# Allegro board proj1_redo.brd
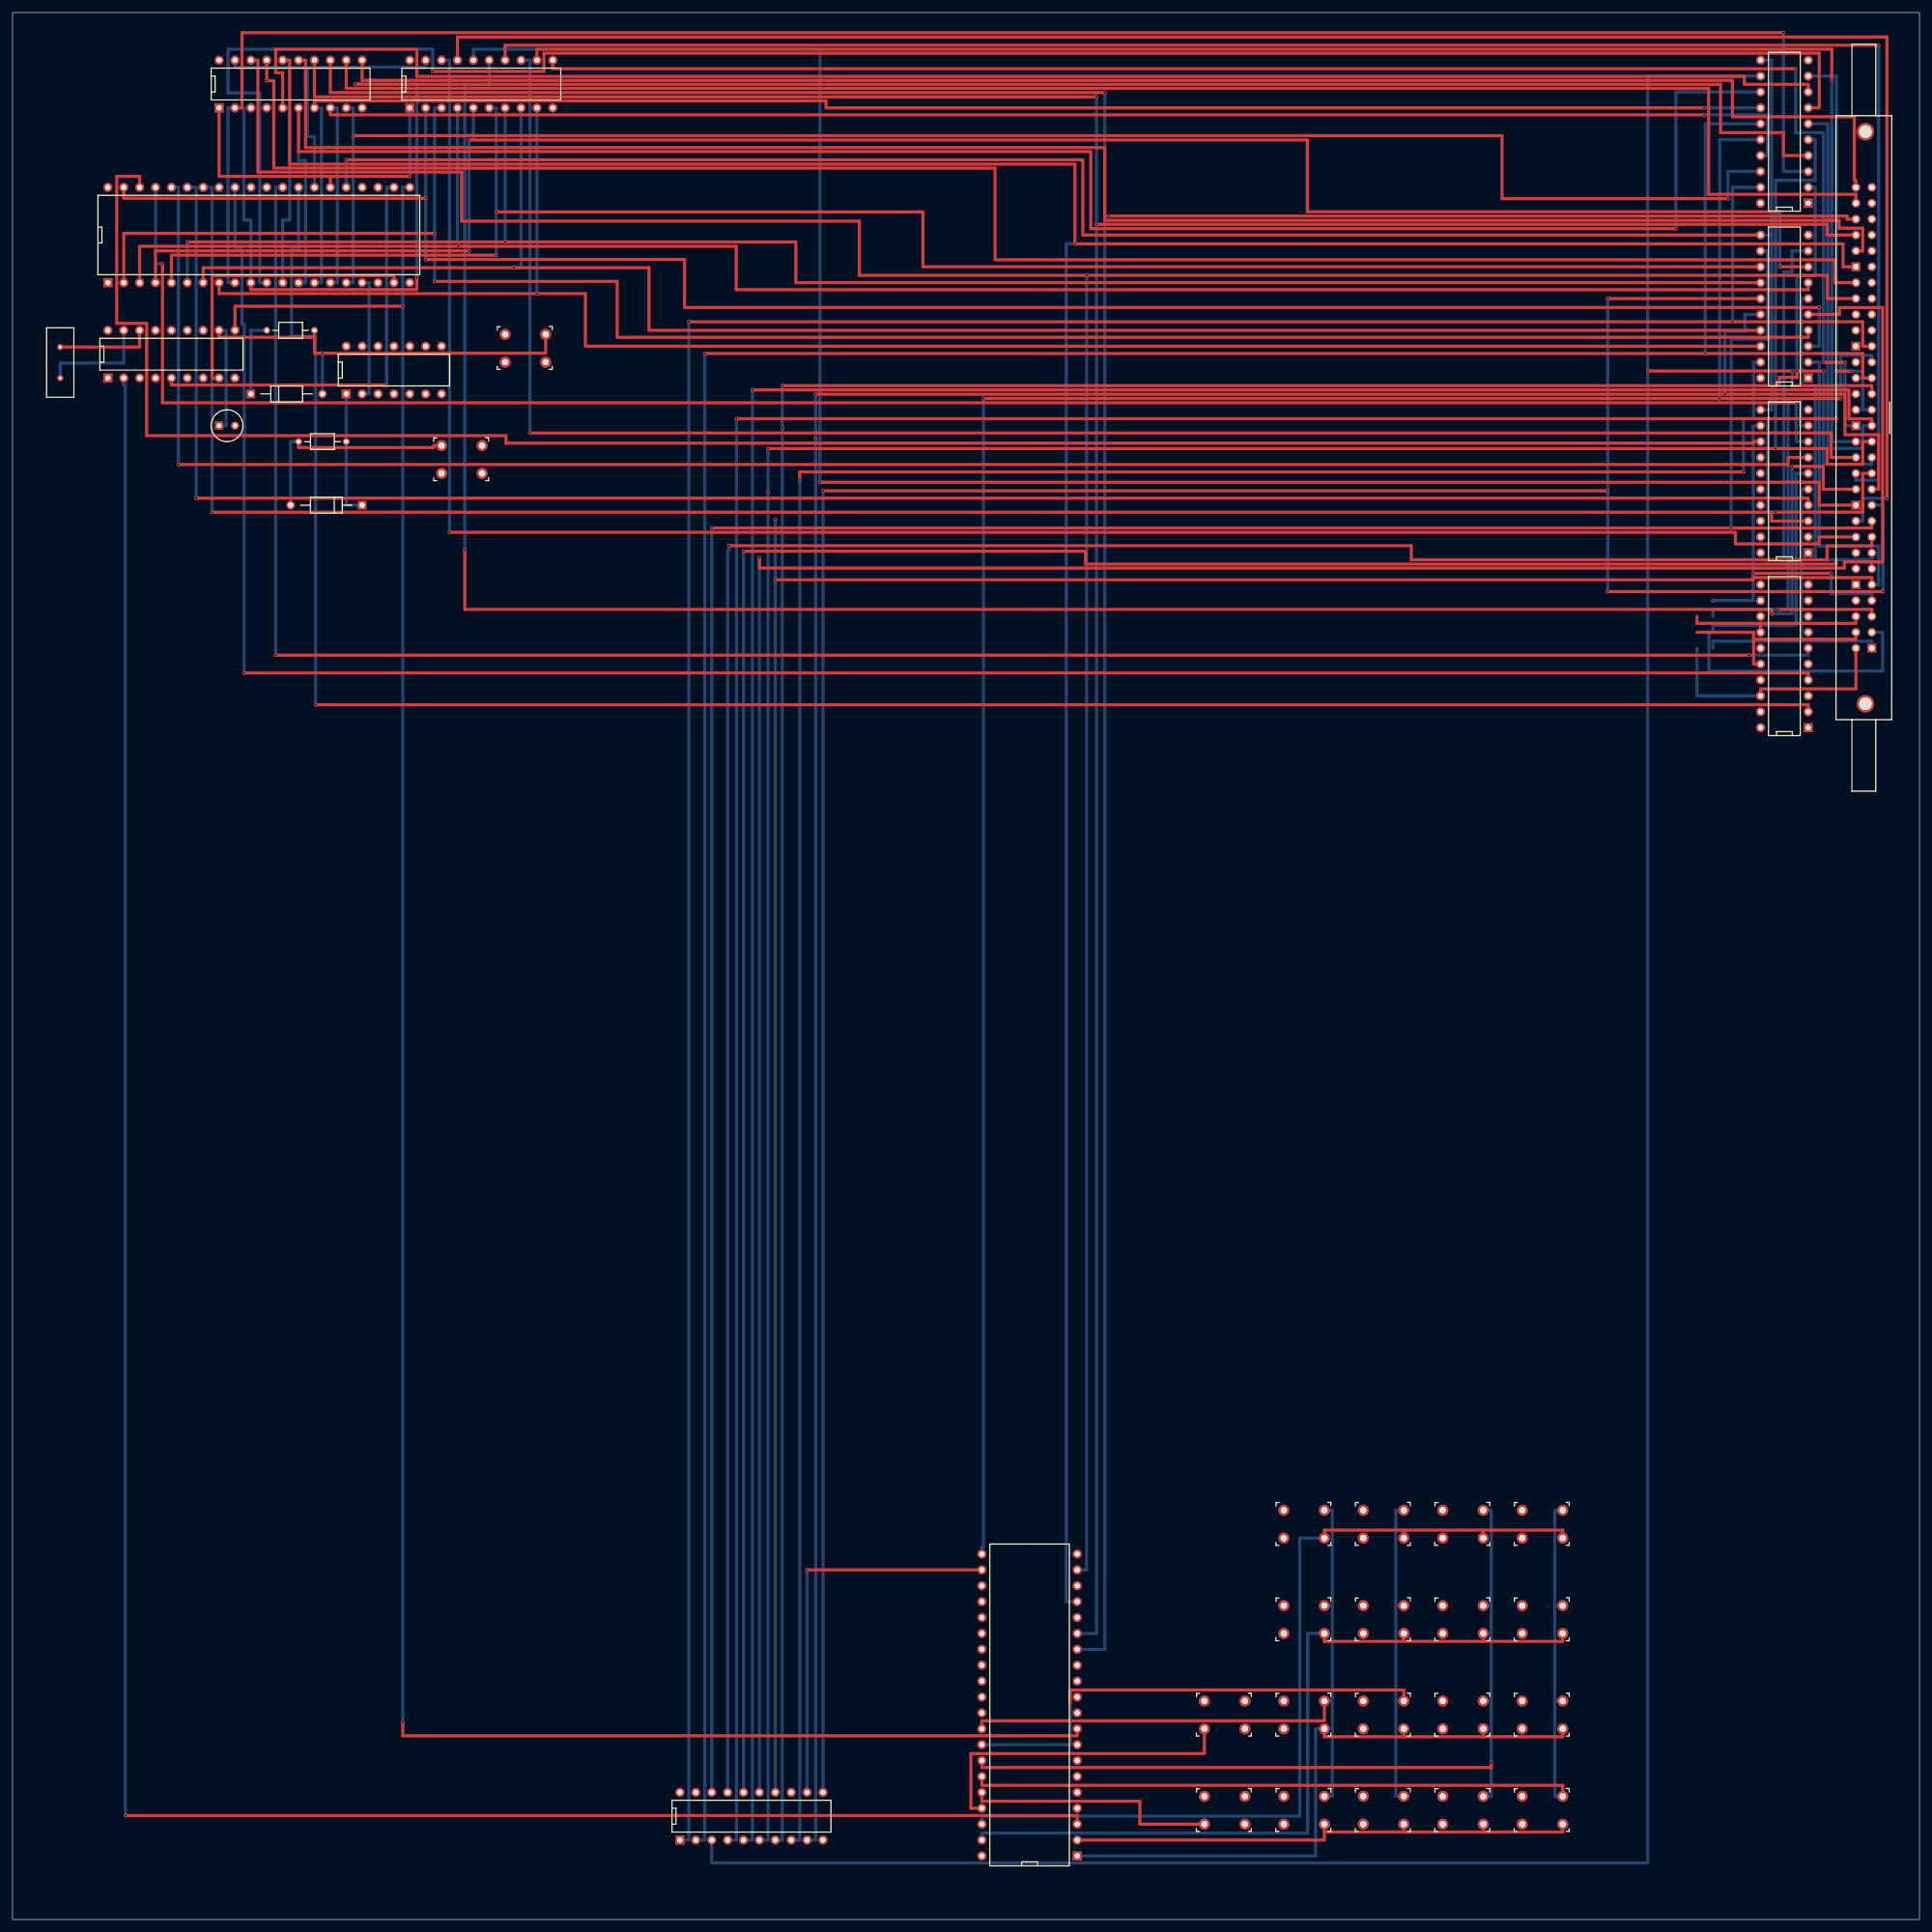
[diagram p0: board, top side]
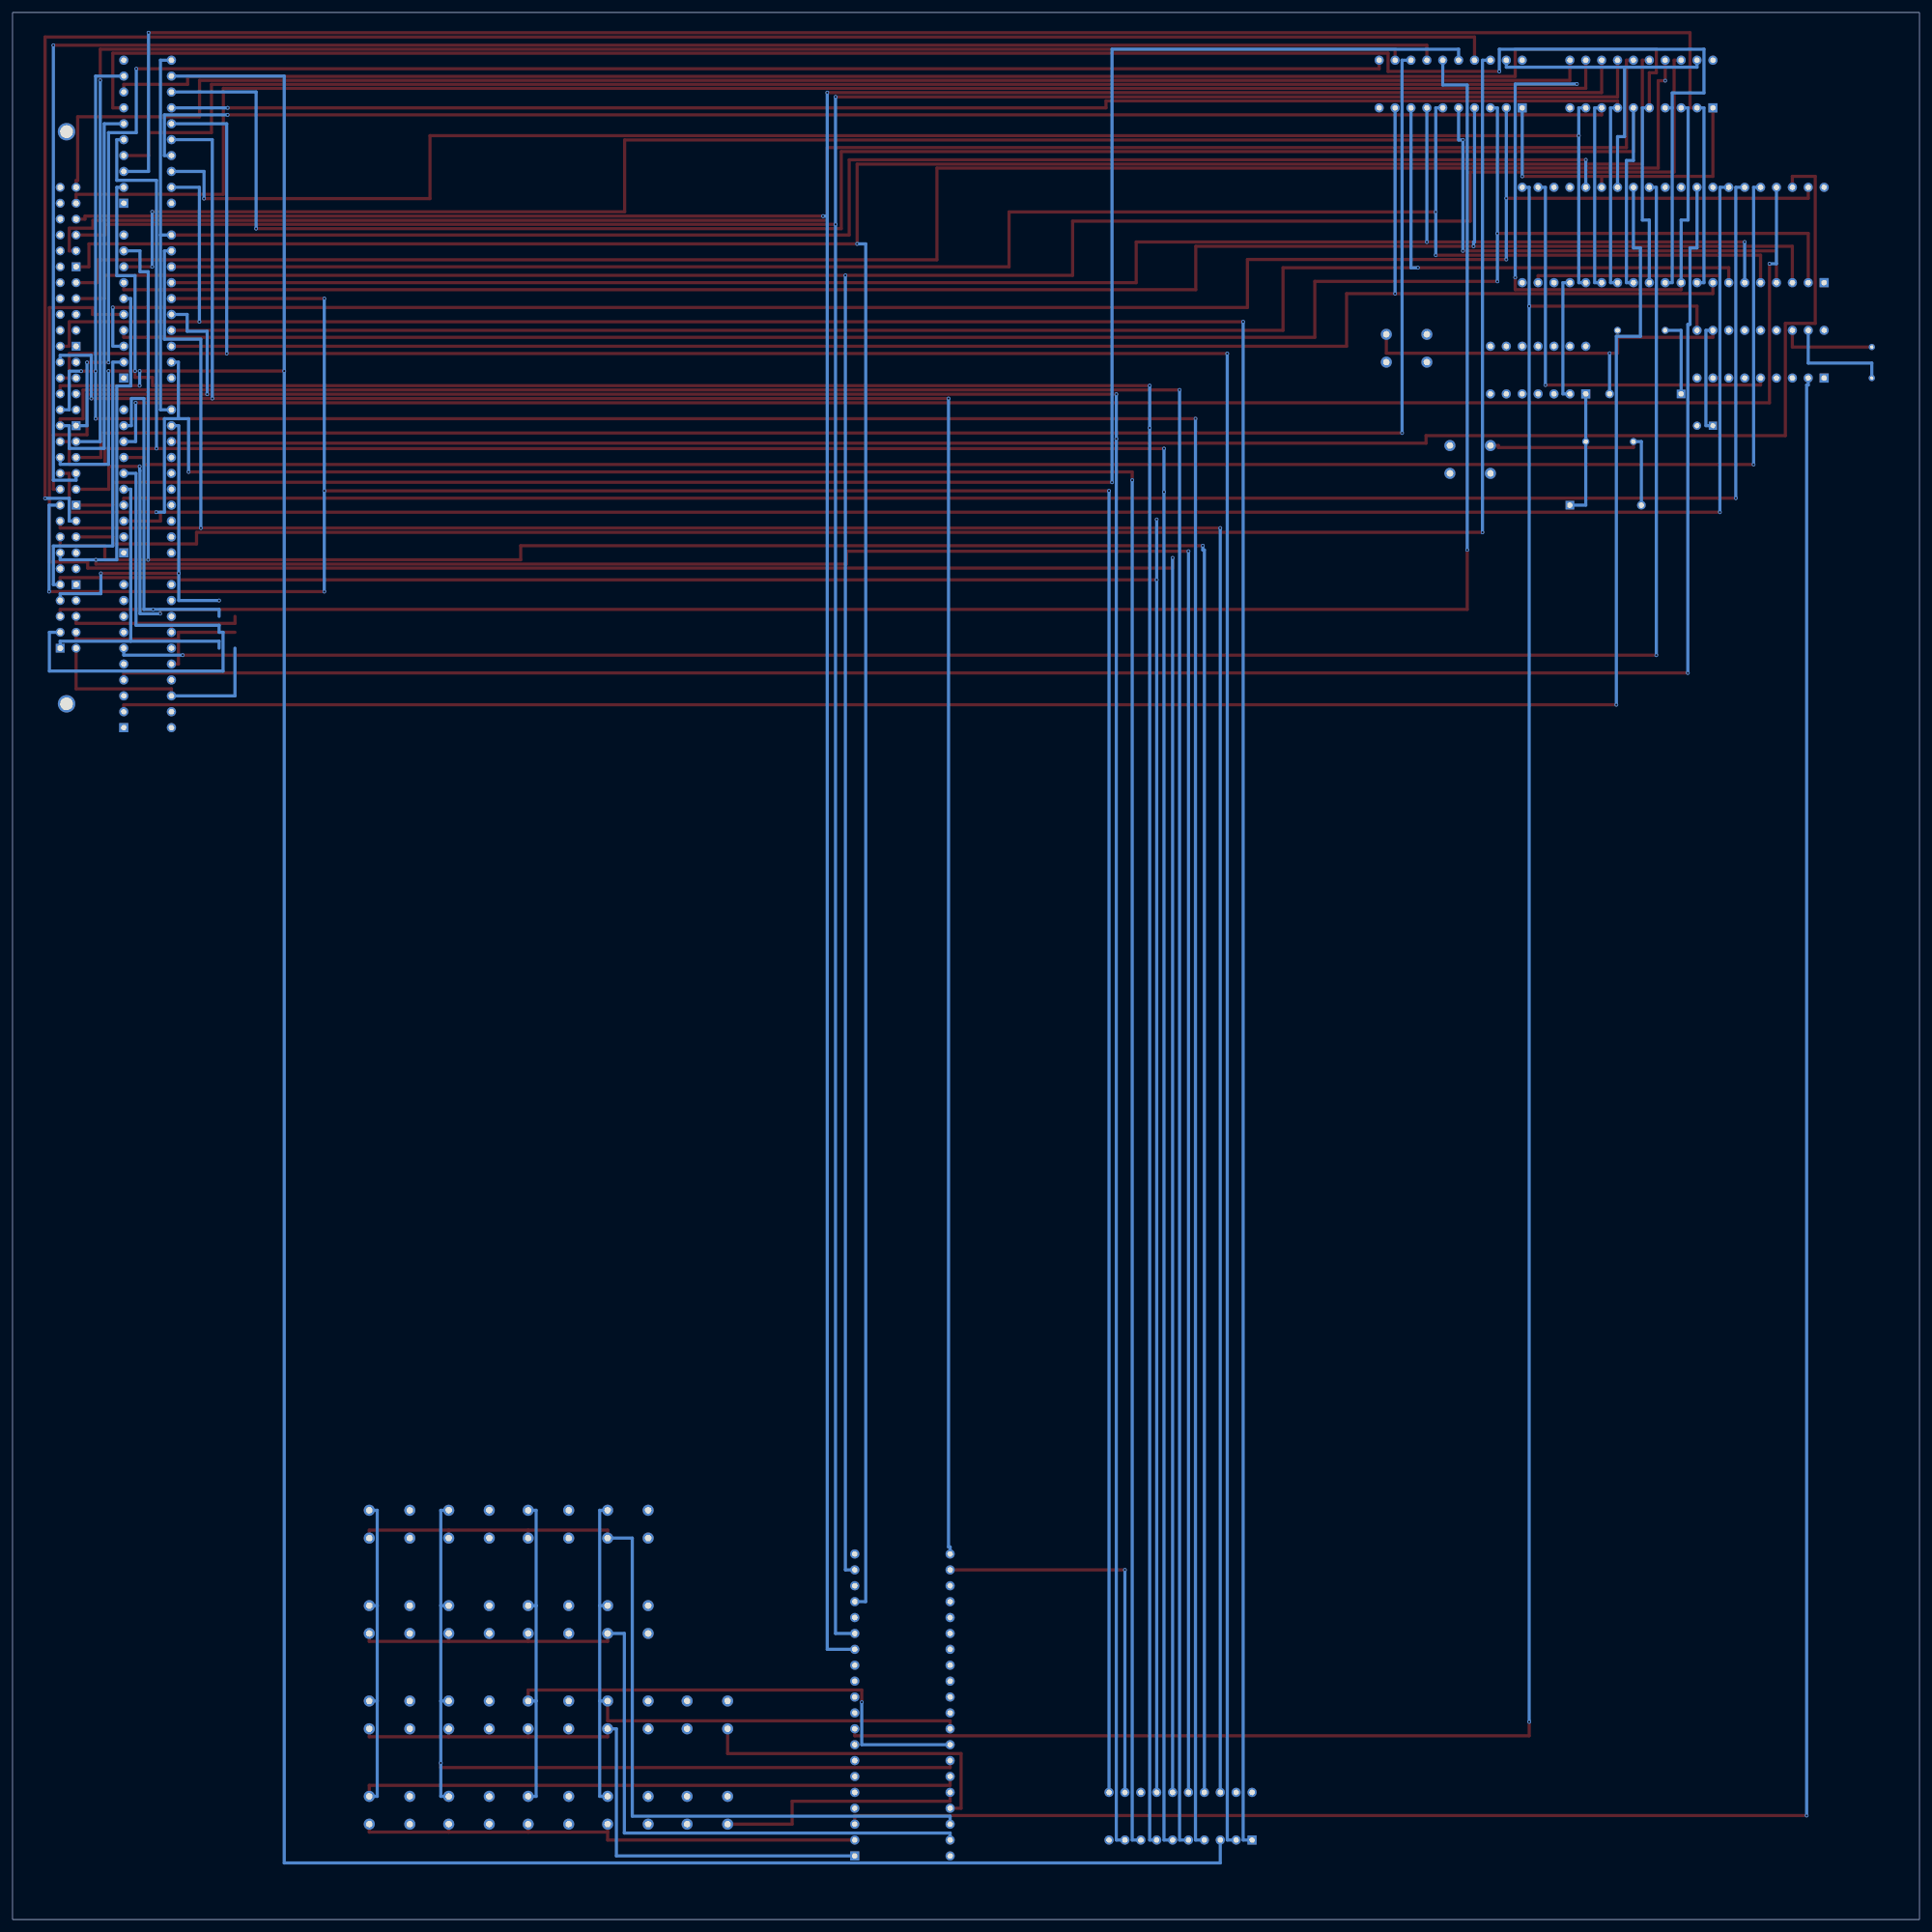
[diagram p1: board, bottom side, seen from below]

Outline 304.8 x 304.8 mm; copper layers: TOP, GND, POWER, BOTTOM. Coordinates in mm from the lower left corner of the outline.
Outline path: rectangle 0,0 304.8,304.8

## Placement (name value [footprint] x y rotation side)
C1  10u  [CPCYL1D200LS100031]  33.02 238.76 0 top
D1  DIODE  [DAX1DO35]  38.1 243.84 0 top
D2  DIODE  [DAX1DO35]  55.88 226.06 180 top
J10  HEADER 30x2/SM  [TYCO100VH60]  297.18 203.2 90 top
R1  10k  [AX300X100028]  40.64 254 0 top
R6  RESISTOR  [AX300X100028]  45.72 236.22 0 top
SW1  SW TACT-SPST-2/SM  [PTS645]  78.74 248.92 0 top
SW2  SW TACT-SPST-2  [PTS645]  203.2 60.96 0 top
SW3  SW TACT-SPST-2  [PTS645]  215.9 60.96 0 top
SW4  SW TACT-SPST-2  [PTS645]  228.6 60.96 0 top
SW5  SW TACT-SPST-2  [PTS645]  241.3 60.96 0 top
SW6  SW TACT-SPST-2  [PTS645]  203.2 45.72 0 top
SW7  SW TACT-SPST-2  [PTS645]  215.9 45.72 0 top
SW8  SW TACT-SPST-2  [PTS645]  228.6 45.72 0 top
SW9  SW TACT-SPST-2  [PTS645]  241.3 45.72 0 top
SW10  SW TACT-SPST-2  [PTS645]  203.2 30.48 0 top
SW11  SW TACT-SPST-2  [PTS645]  215.9 30.48 0 top
SW12  SW TACT-SPST-2  [PTS645]  228.6 30.48 0 top
SW13  SW TACT-SPST-2  [PTS645]  241.3 30.48 0 top
SW14  SW TACT-SPST-2  [PTS645]  203.2 15.24 0 top
SW15  SW TACT-SPST-2  [PTS645]  215.9 15.24 0 top
SW16  SW TACT-SPST-2  [PTS645]  228.6 15.24 0 top
SW17  SW TACT-SPST-2  [PTS645]  241.3 15.24 0 top
SW18  SW TACT-SPST-2  [PTS645]  190.5 30.48 0 top
SW19  SW TACT-SPST-2  [PTS645]  190.5 15.24 0 top
SW21  SW TACT-SPST-2/SM  [PTS645]  68.58 231.14 0 top
U1  8086MIN  [DIP10040W600L2025]  15.24 261.62 0 top
U2  8284A  [DIP10018W300L900]  15.24 246.38 0 top
U3  74LS244  [DIP10020W300L1000]  287.02 190.5 90 top
U4  74LS373  [DIP10020W300L1000]  287.02 218.44 90 top
U5  74LS373  [DIP10020W300L1000]  287.02 246.38 90 top
U6  74LS373  [DIP10020W300L1000]  287.02 274.32 90 top
U7  74LS245  [DIP10020W300L1000]  33.02 289.56 0 top
U8  74LS245  [DIP10020W300L1000]  63.5 289.56 0 top
U21  16L8  [DIP10020W300L1000]  106.68 12.7 0 top
U22  8279  [DIP10040W600L2025]  170.18 10.16 90 top
U35  74LS14  [DIP10014W300L700]  53.34 243.84 0 top
Y1  CRYSTAL  [XTAL_FOX]  7.62 246.38 90 top

## Library data of the parts
C1 = CAPACITOR
D1 D2 = DIODE
J10 = HEADER 30x2/SM
R1 R6 = RESISTOR
SW1 SW21 = SW TACT-SPST-2/SM
SW2-SW19 = SW TACT-SPST-2
U1 = 8086MIN
U2 = 8284A
U3 = 74LS244
U4-U6 = 74LS373
U7 U8 = 74LS245
U21 = 16L8_0
U22 = 8279
U35 = 74LS14
Y1 = CRYSTAL

## Footprints (pads in the part's own frame, mm; a bottom-side part is the same pattern mirrored in y, then rotated)
AX300X100028
  round 1.143 hole 0.711: 1(0,0) 2(7.62,0)
CPCYL1D200LS100031
  rect 1.321x1.321 hole 0.787: 1(0,0)
  round 1.321 hole 0.787: 2(2.54,0)
DAX1DO35
  rect 1.397x1.397 hole 0.864: 1(0,0)
  round 1.397 hole 0.864: 2(11.43,0)
DIP10014W300L700
  rect 1.473x1.473 hole 0.864: 1(0,0)
  round 1.473 hole 0.864: 2(2.54,0) 3(5.08,0) 4(7.62,0) 5(10.16,0) 6(12.7,0) 7(15.24,0) 8(15.24,7.62) 9(12.7,7.62) 10(10.16,7.62) 11(7.62,7.62) 12(5.08,7.62) 13(2.54,7.62) 14(0,7.62)
DIP10018W300L900
  rect 1.473x1.473 hole 0.864: 1(0,0)
  round 1.473 hole 0.864: 2(2.54,0) 3(5.08,0) 4(7.62,0) 5(10.16,0) 6(12.7,0) 7(15.24,0) 8(17.78,0) 9(20.32,0) 10(20.32,7.62) 11(17.78,7.62) 12(15.24,7.62) 13(12.7,7.62) 14(10.16,7.62) 15(7.62,7.62) 16(5.08,7.62) 17(2.54,7.62) 18(0,7.62)
DIP10020W300L1000
  rect 1.473x1.473 hole 0.864: 1(0,0)
  round 1.473 hole 0.864: 2(2.54,0) 3(5.08,0) 4(7.62,0) 5(10.16,0) 6(12.7,0) 7(15.24,0) 8(17.78,0) 9(20.32,0) 10(22.86,0) 11(22.86,7.62) 12(20.32,7.62) 13(17.78,7.62) 14(15.24,7.62) 15(12.7,7.62) 16(10.16,7.62) 17(7.62,7.62) 18(5.08,7.62) 19(2.54,7.62) 20(0,7.62)
DIP10040W600L2025
  rect 1.473x1.473 hole 0.864: 1(0,0)
  round 1.473 hole 0.864: 2(2.54,0) 3(5.08,0) 4(7.62,0) 5(10.16,0) 6(12.7,0) 7(15.24,0) 8(17.78,0) 9(20.32,0) 10(22.86,0) 11(25.4,0) 12(27.94,0) 13(30.48,0) 14(33.02,0) 15(35.56,0) 16(38.1,0) 17(40.64,0) 18(43.18,0) 19(45.72,0) 20(48.26,0) 21(48.26,15.24) 22(45.72,15.24) 23(43.18,15.24) 24(40.64,15.24) 25(38.1,15.24) 26(35.56,15.24) 27(33.02,15.24) 28(30.48,15.24) 29(27.94,15.24) 30(25.4,15.24) 31(22.86,15.24) 32(20.32,15.24) 33(17.78,15.24) 34(15.24,15.24) 35(12.7,15.24) 36(10.16,15.24) 37(7.62,15.24) 38(5.08,15.24) 39(2.54,15.24) 40(0,15.24)
PTS645
  round 1.778 hole 1.029: 1(0,0) 2(6.477,0) 3(0,4.445) 4(6.477,4.445)
TYCO100VH60
  rect 1.422x1.422 hole 0.914: 1(0,0) 10(10.16,2.54) 20(22.86,2.54) 30(35.56,2.54) 40(48.26,2.54) 50(60.96,2.54)
  round 1.422 hole 0.914: 2(0,2.54) 3(2.54,0) 4(2.54,2.54) 5(5.08,0) 6(5.08,2.54) 7(7.62,0) 8(7.62,2.54) 9(10.16,0) 11(12.7,0) 12(12.7,2.54) 13(15.24,0) 14(15.24,2.54) 15(17.78,0) 16(17.78,2.54) 17(20.32,0) 18(20.32,2.54) 19(22.86,0) 21(25.4,0) 22(25.4,2.54) 23(27.94,0) 24(27.94,2.54) 25(30.48,0) 26(30.48,2.54) 27(33.02,0) 28(33.02,2.54) 29(35.56,0) 31(38.1,0) 32(38.1,2.54) 33(40.64,0) 34(40.64,2.54) 35(43.18,0) 36(43.18,2.54) 37(45.72,0) 38(45.72,2.54) 39(48.26,0) 41(50.8,0) 42(50.8,2.54) 43(53.34,0) 44(53.34,2.54) 45(55.88,0) 46(55.88,2.54) 47(58.42,0) 48(58.42,2.54) 49(60.96,0) 51(63.5,0) 52(63.5,2.54) 53(66.04,0) 54(66.04,2.54) 55(68.58,0) 56(68.58,2.54) 57(71.12,0) 58(71.12,2.54) 59(73.66,0) 60(73.66,2.54)
  round 2.794 hole 2.032: HOLE1(-8.89,1.016) HOLE2(82.55,1.016)
XTAL_FOX
  round 1.016 hole 0.508: 1(0,0) 2(4.953,0)

## Nets
+5V: D1.1(K) R1.1
GND: C1.2 SW1.2 SW18.3 SW19.3 SW21.1 U1.1 U1.20 U1.33(MN) U1.40 U2.1(CSYNC) U2.9 U2.13(F/C\) U2.18 U3.1(1\O\E\) U3.10 U3.19(2\O\E\) U3.20 U4.1(O\E\) U4.10 U4.20 U5.1(O\E\) U5.10 U5.20 U6.1(O\E\) U6.10 U6.20 U7.10 U7.20 U8.10 U8.20 U21.10 U21.20 U22.20 U22.40 U35.7 U35.14
A0: J10.39 U6.19(Q7) U21.1(I1)
A1: J10.37 U6.16(Q6) U22.21(A0)
A2: J10.35 U6.15(Q5) U21.2(I2)
A3: J10.33 U6.12(Q4) U21.3(I3)
A4: J10.31 U6.9(Q3) U21.4(I4)
A5: J10.29 U6.6(Q2) U21.5(I5)
A6: J10.27 U6.5(Q1) U21.6(I6)
A7: J10.25 U6.2(Q0) U21.7(I7)
A8: J10.23 U5.19(Q7) U21.8(I8)
A9: J10.21 U5.16(Q6) U21.9(I9)
A10: J10.19 U5.15(Q5) U21.11(I10)
A11: J10.17 U5.12(Q4) U21.18(O\2\)
A12: J10.15 U5.9(Q3) U21.17(O\3\)
A13: J10.13 U5.6(Q2) U21.16(O\4\)
A14: J10.11 U5.5(Q1) U21.15(O\5\)
A15: J10.9 U5.2(Q0) U21.14(O\6\)
A16: J10.7 U4.12(Q4)
A17: J10.5 U4.9(Q3)
A18: J10.3 U4.6(Q2)
A19: J10.1 U4.5(Q1)
AD0: U1.16(AD0) U6.18(D7) U7.9(A7)
AD1: U1.15(AD1) U6.17(D6) U7.8(A6)
AD2: U1.14(AD2) U6.14(D5) U7.7(A5)
AD3: U1.13(AD3) U6.13(D4) U7.6(A4)
AD4: U1.12(AD4) U6.8(D3) U7.5(A3)
AD5: U1.11(AD5) U6.7(D2) U7.4(A2)
AD6: U1.10(AD6) U6.4(D1) U7.3(A1)
AD7: U1.9(AD7) U6.3(D0) U7.2(A0)
AD8: U1.8(AD8) U5.18(D7) U8.9(A7)
AD9: U1.7(AD9) U5.17(D6) U8.8(A6)
AD10: U1.6(AD10) U5.14(D5) U8.7(A5)
AD11: U1.5(AD11) U5.13(D4) U8.6(A4)
AD12: U1.4(AD12) U5.8(D3) U8.5(A3)
AD13: U1.3(AD13) U5.7(D2) U8.4(A2)
AD14: U1.2(AD14) U5.4(D1) U8.3(A1)
AD15: U1.39(AD15) U5.3(D0) U8.2(A0)
AD16: U1.38(A16/S3) U4.13(D4)
AD17: U1.37(A17/S4) U4.8(D3)
AD18: U1.36(A18/S5) U4.7(D2)
AD19: U1.35(A19/S6) U4.4(D1)
ALE: U1.25(ALE) U4.11(L\E\) U5.11(L\E\) U6.11(L\E\)
BHE: U4.2(Q0)
BHEX: U1.34(B\H\E\/S7) U4.3(D0)
D0: J10.60 U7.11(B7) U22.12(DB0)
D1: J10.58 U7.12(B6) U22.13(DB1)
D2: J10.56 U7.13(B5) U22.14(DB2)
D3: J10.54 U7.14(B4) U22.15(DB3)
D4: J10.52 U7.15(B3) U22.16(DB4)
D5: J10.50 U7.16(B2) U22.17(DB5)
D6: J10.48 U7.17(B1) U22.18(DB6)
D7: J10.46 U7.18(B0) U22.19(DB7)
D8: J10.30 U8.11(B7)
D9: J10.28 U8.12(B6)
D10: J10.26 U8.13(B5)
D11: J10.24 U8.14(B4)
D12: J10.22 U8.15(B3)
D13: J10.20 U8.16(B2)
D14: J10.18 U8.17(B1)
D15: J10.16 U8.18(B0)
DEN: U1.26(D\E\N\) U7.1(DIR) U8.1(DIR)
DTR: U1.27(DT/R\) U7.19(G\) U8.19(G\)
INTA: U1.24(I\N\T\A\)
IORC: U22.10(R\D\)
IOWC: U22.11(W\R\)
IR2: U22.4(IRQ)
MIO: J10.2 U3.18(Y1)
MIOX: U1.28(M/I\O\) U3.2(A1)
PCLK: U2.2(PCLK) U22.3(CLK)
RD: J10.4 U3.16(Y2)
RDX: U1.32(R\D\) U3.4(A2)
RESET: U1.21(RST) U2.10(RESET) U22.9(RESET)
WR: J10.6 U3.14(Y3)
WRX: U1.29(W\R\) U3.6(A3)
N00598: C1.1 D1.2(A) R1.2 SW1.4 U2.11(R\E\S\)
N00858: U2.16(X2) Y1.2
N00870: U2.17(X1) Y1.1
N02031: U1.22(READY) U2.5(READY)
N02057: U1.19(CLK) U2.8(CLK)
N55935: SW2.2 SW3.2 SW4.2 SW5.2 U22.38(RL0)
N56126: SW6.2 SW7.2 SW8.2 SW9.2 U22.39(RL1)
N56183: SW10.2 SW11.2 SW12.2 SW13.2 U22.1(RL2)
N56240: SW14.2 SW15.2 SW16.2 SW17.2 U22.2(RL3)
N56297: SW5.4 SW9.4 SW13.4 SW17.4 U22.35(SL3)
N56375: SW4.4 SW8.4 SW12.4 SW16.4 U22.34(SL2)
N56504: SW3.4 SW7.4 SW11.4 SW15.4 U22.33(SL1)
N56571: SW2.4 SW6.4 SW10.4 SW14.4 U22.32(SL0)
N56977: SW18.1 U22.37(CN/ST)
N56984: SW19.1 U22.36(SHFT)
N57547: U21.12(O\8\) U22.22(C\S\)
N125571: U35.4(Y)
N146408: U1.17(NMI) U35.2(Y)
N146815: D2.1(K) R6.2 U35.1(A)
N146827: D2.2(A) R6.1 SW21.3
N147071: SW21.2
N148364: U35.3(A)

Pads without a net: J10 8 10 12 14 32 34 36 38 40 41 42 43 44 45 47 49 51 53 55 57 59 HOLE1 HOLE2; SW1 1 3; SW2 1 3; SW3 1 3; SW4 1 3; SW5 1 3; SW6 1 3; SW7 1 3; SW8 1 3; SW9 1 3; SW10 1 3; SW11 1 3; SW12 1 3; SW13 1 3; SW14 1 3; SW15 1 3; SW16 1 3; SW17 1 3; SW18 2 4; SW19 2 4; SW21 4; U1 18 23 30 31; U2 3 4 6 7 12 14 15; U3 3 5 7 8 9 11 12 13 15 17; U4 14 15 16 17 18 19; U21 13 19; U22 5 6 7 8 23 24 25 26 27 28 29 30 31; U35 5 6 8 9 10 11 12 13

## Via types
v1: diameter 0.61, hole 0.33, TOP to BOTTOM, 109 vias

## Routing (per net, layer and track width the routed paths; a pad name or vN(x,y) marks a point on that pad's centre or on a via; arc(x,y) is an arc through that point)
+5V: length 12.7
  BOTTOM w0.508: R1.1 38.1,254 D1.1
A0: length 463
  TOP w0.508: J10.39 295.73,251.46 295.73,255.37 v1(274.93,255.37) v1(108.1,255.37)
  BOTTOM w0.508: U21.1 108.1,12.7 v1(108.1,255.37) ; v1(274.93,255.37) 274.93,276.86 U6.19
A1: length 382.8
  TOP w0.508: v1(155.19,243.1) v1(272.87,243.1) v1(292.2,243.1)
  BOTTOM w0.508: U22.21 154.94,59.54 155.19,59.54 v1(155.19,243.1) ; J10.37 297.18,250.01 292.2,250.01 v1(292.2,243.1) ; v1(272.87,243.1) 272.87,284.48 U6.16
A2: length 475
  TOP w0.508: v1(110.64,250.29) v1(270.56,250.29) 295.73,250.29 295.73,246.38 J10.35
  BOTTOM w0.508: U21.2 110.64,12.7 v1(110.64,250.29) ; U6.15 270.56,287.02 v1(270.56,250.29)
A3: length 496.4
  TOP w0.508: v1(284.48,245.16) 297.18,245.16 J10.33 ; v1(284.48,247.5) v1(261.37,247.5)
  BOTTOM w0.508: U6.12 261.37,294.64 v1(261.37,247.5) 261.37,9.04 111.76,9.04 U21.3 ; v1(284.48,245.16) v1(284.48,247.5)
A4: length 475.5
  TOP w0.508: v1(293.83,247.47) v1(291.52,247.47) ; v1(291.52,239.88) v1(115.72,239.88)
  BOTTOM w0.508: v1(293.83,247.47) 295.73,247.47 295.73,241.3 J10.31 ; U21.4 115.72,12.7 v1(115.72,239.88) ; U6.9 291.52,294.64 v1(291.52,247.47) v1(291.52,239.88)
A5: length 483.5
  TOP w0.508: J10.29 297.18,239.85 293.52,239.85 293.52,244.47 v1(118.26,244.47)
  BOTTOM w0.508: U6.6 290.14,287.02 290.14,235.13 295.73,235.13 295.73,238.76 J10.29 ; v1(118.26,244.47) 118.26,12.7 U21.5
A6: length 463.2
  TOP w0.508: v1(120.75,235.1) v1(281.79,235.1) 290.04,235.1 290.04,232.59 295.73,232.59 295.73,236.22 J10.27
  BOTTOM w0.508: v1(281.79,235.1) 281.79,277.98 288.14,277.98 288.14,284.48 U6.5 ; v1(120.75,235.1) v1(120.75,228.17) 120.75,12.7 U21.6
A7: length 459.5
  TOP w0.508: v1(289.46,247.5) v1(285.22,247.5) 285.22,246.48 282.42,246.48 282.42,245.16 v1(123.04,245.16)
  BOTTOM w0.508: J10.25 297.18,232.59 289.46,232.59 v1(289.46,247.5) ; v1(123.04,245.16) v1(123.04,238.4) 123.04,12.7 U21.7 ; U6.2 288.14,276.86 288.14,262.74 285.22,262.74 v1(285.22,247.5)
A8: length 431.2
  TOP w0.508: J10.23 295.73,231.14 295.73,224.94 v1(281.84,224.94) ; v1(276.66,231.37) 125.83,231.37 v1(125.83,230.05)
  BOTTOM w0.508: v1(276.66,231.37) 276.66,239.88 278.28,239.88 ; 278.28,239.88 280.52,239.88 280.52,224.94 v1(281.84,224.94) ; 278.28,239.88 278.28,248.92 U5.19 ; U21.8 125.83,12.7 v1(125.83,230.05)
A9: length 437.1
  TOP w0.508: v1(128.37,243.79) v1(273.69,243.79) 292.89,243.79 292.89,237.31 298.27,237.31 298.27,228.6 J10.21
  BOTTOM w0.508: v1(128.37,243.79) v1(128.37,236.65) 128.37,12.7 U21.9 ; U5.16 276.89,256.54 276.89,253.85 273.69,253.85 v1(273.69,243.79)
A10: length 464.3
  TOP w0.508: v1(298.96,212.24) v1(254.97,212.24) ; U5.15 v1(254.97,259.08) ; v1(254.97,228.35) v1(129.54,228.35)
  BOTTOM w0.508: v1(298.96,212.24) 298.96,226.06 J10.19 ; v1(254.97,212.24) v1(254.97,228.35) v1(254.97,259.08) ; U21.11 v1(129.54,228.35)
A11: length 439.9
  TOP w0.508: v1(111.76,222.4) v1(274.7,222.4) 297.18,222.4 J10.17
  BOTTOM w0.508: v1(274.7,222.4) 274.7,252.58 280.52,252.58 280.52,266.7 U5.12 ; U21.18 v1(111.76,222.4)
A12: length 441.3
  TOP w0.508: v1(114.55,219.58) 223.57,219.58 223.57,217.32 v1(283.11,217.32) 290.04,217.32 290.04,219.53 297.18,219.53 J10.15
  BOTTOM w0.508: U21.17 114.3,218.89 114.55,218.89 v1(114.55,219.58) ; v1(283.11,217.32) 283.11,263.37 284.43,263.37 284.43,266.7 U5.9
A13: length 431
  TOP w0.508: v1(116.84,218.69) 171.5,218.69 171.5,216.64 291.47,216.64 v1(291.47,217.32)
  BOTTOM w0.508: U21.16 v1(116.84,218.69) ; U5.6 285.9,259.08 285.9,245.11 288.14,245.11 288.14,217.32 v1(291.47,217.32) 297.18,217.32 J10.13
A14: length 434.2
  TOP w0.508: J10.11 297.18,216.99 ; 297.18,216.99 292.79,216.99 292.79,216 119.38,216 v1(119.38,217.63) ; 297.18,216.99 298.91,216.99 298.91,257.63 292,257.63 292,256.54 U5.5
  BOTTOM w0.508: U21.15 v1(119.38,217.63)
A15: length 428.1
  TOP w0.508: v1(121.92,214.12) 278.18,214.12 278.18,214.48 297.18,214.48 J10.9
  BOTTOM w0.508: J10.9 298.27,213.36 298.27,219.53 288.77,219.53 288.77,248.92 U5.2 ; v1(121.92,223.77) v1(121.92,214.12) U21.14
A16: length 58.9
  TOP w0.508: v1(290.68,215.16) v1(278.23,215.16)
  BOTTOM w0.508: U4.12 278.23,238.76 v1(278.23,215.16) 278.23,210.82 v1(271.78,210.82) ; v1(290.68,215.16) 290.68,211.91 297.18,211.91 J10.7
A17: length 70.4
  TOP w0.508: v1(282.32,209.4) 297.18,209.4 J10.5
  BOTTOM w0.508: 271.78,208.28 271.78,209.4 v1(282.32,209.4) 283.79,209.4 283.79,243.1 285.8,243.1 285.8,238.76 U4.9
A18: length 83.2
  BOTTOM w0.508: J10.3 298.91,205.74 298.91,199.54 271.15,199.54 271.15,205.74 271.78,205.74 271.78,206.86 285.06,206.86 285.06,231.14 U4.6
A19: length 53
  BOTTOM w0.508: 285.9,204.32 285.9,228.6 U4.5 ; 285.9,204.32 271.78,204.32 271.78,203.2 ; 285.9,204.32 297.18,204.32 J10.1
AD0: length 269.5
  TOP w0.508: v1(274.19,275.06) 238.07,275.06 238.07,285.12 v1(54.46,285.12)
  BOTTOM w0.508: v1(274.19,275.06) 274.19,279.4 U6.18 ; U1.16 54.46,261.62 v1(54.46,285.12) 54.46,289.56 U7.9
AD1: length 268.6
  TOP w0.508: U7.8 50.8,288.44 v1(270.41,288.44)
  BOTTOM w0.508: U1.15 51.92,261.62 51.92,289.56 U7.8 ; U6.17 280.52,281.94 280.52,288.44 v1(270.41,288.44)
AD2: length 263.6
  TOP w0.508: U7.7 48.26,290.68 130.02,290.68 130.02,289.56 v1(270.41,289.56)
  BOTTOM w0.508: U1.14 49.38,261.62 49.38,289.56 U7.7 ; U6.14 v1(270.41,289.56)
AD3: length 305
  TOP w0.508: v1(265.86,270.26) 172.34,270.26 172.34,282.57 45.72,282.57 U7.6
  BOTTOM w0.508: U7.6 45.72,281.15 46.84,281.15 46.84,261.62 U1.13 ; U6.13 265.86,292.1 v1(265.86,270.26)
AD4: length 292.5
  TOP w0.508: U7.5 43.18,295.17 42.06,295.17 42.06,298.93 64.62,298.93 64.62,294.59 276.81,294.59 276.81,293.32 287.02,293.32 U6.8
  BOTTOM w0.508: U1.12 43.18,271.63 44.3,271.63 44.3,289.56 U7.5
AD5: length 315.9
  TOP w0.508: v1(67.16,295.38) 84.94,295.38 84.94,298.3 288.77,298.3 288.77,289.56 U6.7
  BOTTOM w0.508: U7.4 39.52,289.56 ; 39.52,289.56 39.52,261.62 U1.11 ; 39.52,289.56 39.52,291.95 34.44,291.95 34.44,298.93 67.16,298.93 v1(67.16,295.38)
AD6: length 344.2
  TOP w0.508: U1.10 38.1,260.5 64.62,260.5 v1(64.62,262.45) ; U6.4 283.06,281.94 283.06,285.6 273,285.6 273,293.32 55.45,293.32 55.45,293.37 v1(54.76,293.37)
  BOTTOM w0.508: v1(64.62,262.45) 64.62,293.37 v1(54.76,293.37) ; U1.10 38.1,271.63 36.98,271.63 36.98,289.56 U7.3
AD7: length 315.8
  TOP w0.508: v1(283.06,301.57) 36.68,301.57 36.68,289.56 U7.2
  BOTTOM w0.508: U6.3 283.06,279.4 v1(283.06,301.57) ; U7.2 34.44,289.56 34.44,261.62 U1.9
AD8: length 286.2
  TOP w0.508: U1.8 33.02,259.87 v1(83.82,259.87) 91.57,259.87 91.57,251.46 U5.18
  BOTTOM w0.508: U8.9 v1(83.82,259.87)
AD9: length 288
  TOP w0.508: U1.7 30.48,264.01 v1(80.16,264.01) 101.73,264.01 101.73,254 U5.17
  BOTTOM w0.508: v1(80.16,264.01) 81.28,264.01 U8.8
AD10: length 285.9
  TOP w0.508: v1(27.94,268.12) v1(78.74,268.12) 125.2,268.12 125.2,261.62 U5.14
  BOTTOM w0.508: U8.7 v1(78.74,268.12) ; U1.6 v1(27.94,268.12)
AD11: length 291.8
  TOP w0.508: U5.13 145.52,264.16 145.52,272.92 v1(77.32,272.92) ; v1(77.32,266.01) 25.4,266.01 U1.5
  BOTTOM w0.508: v1(77.32,266.01) v1(77.32,272.92) 77.32,289.56 U8.6
AD12: length 313.1
  TOP w0.508: v1(72.97,266.7) 22.86,266.7 U1.4 ; U5.8 v1(282.47,264.16) ; v1(282.47,272.95) 206.96,272.95 206.96,284.43 v1(72.97,284.43)
  BOTTOM w0.508: U8.5 73.66,284.43 v1(72.97,284.43) v1(72.97,266.7) ; v1(282.47,264.16) v1(282.47,272.95)
AD13: length 302.8
  TOP w0.508: U5.7 287.02,260.5 115.67,260.5 115.67,267.44 v1(71.27,267.44) 20.32,267.44 U1.3
  BOTTOM w0.508: U8.4 71.12,268.12 71.27,268.12 v1(71.27,267.44)
AD14: length 316
  TOP w0.508: v1(67.46,269.5) 17.78,269.5 U1.2 ; U5.4 287.02,252.88 96.65,252.88 96.65,261.82 v1(67.46,261.82)
  BOTTOM w0.508: U8.3 67.46,289.56 v1(67.46,269.5) v1(67.46,261.82)
AD15: length 312.6
  TOP w0.508: v1(66.04,265.33) 107.42,265.33 107.42,257.66 v1(288.77,257.66) ; v1(66.04,275.11) 17.78,275.11 U1.39
  BOTTOM w0.508: v1(66.04,265.33) v1(66.04,275.11) U8.2 ; U5.3 288.77,251.46 v1(288.77,257.66)
AD16: length 311
  TOP w0.508: U4.13 278.28,236.22 278.28,235.97 78.87,235.97 78.87,237.17 21.44,237.17 21.44,255.12 16.66,255.12 16.66,278.61 20.32,278.61 U1.38
AD17: length 304.8
  TOP w0.508: v1(23.98,264.64) 23.98,242.42 v1(285.12,242.42)
  BOTTOM w0.508: v1(285.12,242.42) 285.12,236.22 U4.8 ; v1(23.98,264.64) 22.86,264.64 U1.37
AD18: length 307
  TOP w0.508: v1(26.52,232.56) 283.79,232.56 283.79,233.68 U4.7
  BOTTOM w0.508: U1.36 26.52,276.86 v1(26.52,232.56)
AD19: length 309.9
  TOP w0.508: U4.4 287.02,227.18 v1(29.36,227.18)
  BOTTOM w0.508: U1.35 29.36,276.86 v1(29.36,227.18)
ALE: length 303.6
  TOP w0.508: U5.11 171.07,269.24 171.07,281.25 v1(53.34,281.25)
  BOTTOM w0.508: U4.11 281.15,241.3 281.15,269.24 ; 281.15,269.24 281.15,297.18 U6.11 ; 281.15,269.24 U5.11 ; U1.25 v1(53.34,281.25)
BHEX: length 309.9
  TOP w0.508: v1(31.9,224.93) 281.15,224.93 281.15,223.52 U4.3
  BOTTOM w0.508: v1(31.9,224.93) 31.9,276.86 U1.34
D0: length 259.1
  TOP w0.508: U7.11 55.88,293.95 274.91,293.95 274.91,288.14 294.39,288.14 294.39,277.95 294.64,277.95 J10.60
D1: length 264.2
  TOP w0.508: U7.12 53.34,292.68 271.1,292.68 271.1,275.74 294.64,275.74 J10.58
D2: length 502.7
  TOP w0.508: J10.56 293.22,271.78 293.22,272.26 v1(175.26,272.26) ; U7.13 50.8,292 v1(174.57,292)
  BOTTOM w0.508: v1(175.26,272.26) 174.57,272.26 ; 174.57,272.26 174.57,43.18 U22.14 ; 174.57,272.26 v1(174.57,292)
D3: length 502.6
  TOP w0.508: U7.14 48.26,291.31 v1(173.25,291.31) ; v1(173.25,270.94) 290.04,270.94 290.04,269.24 J10.54
  BOTTOM w0.508: v1(173.25,291.31) v1(173.25,270.94) 173.25,45.72 U22.15
D4: length 281.6
  TOP w0.508: J10.52 295.73,266.7 295.73,270.33 291.95,270.33 291.95,271.58 174.57,271.58 174.57,283.21 46.84,283.21 46.84,297.18 U7.15
D5: length 504.6
  TOP w0.508: U7.16 44.3,297.18 44.3,280.57 169.8,280.57 v1(169.8,267.82) 292.58,267.82 292.58,264.16 J10.50
  BOTTOM w0.508: v1(169.8,267.82) 168.43,267.82 168.43,50.8 U22.17
D6: length 289.6
  TOP w0.508: U7.17 v1(40.64,293.9) 41.76,293.9 41.76,279.93 157.05,279.93 157.05,265.28 291.31,265.28 291.31,261.62 J10.48
D7: length 503
  TOP w0.508: J10.46 290.09,259.08 290.09,262.79 v1(171.68,262.79) 135.36,262.79 135.36,271.45 71.81,271.45 71.81,279.3 39.22,279.3 39.22,297.18 U7.18
  BOTTOM w0.508: U22.19 171.68,55.88 v1(171.68,262.79)
D8: length 266.7
  TOP w0.508: v1(292.89,248.87) v1(289.46,248.87) ; U8.11 86.36,295.81 v1(285.01,295.81)
  BOTTOM w0.508: v1(289.46,248.87) 289.46,285.6 285.01,285.6 v1(285.01,295.81) ; v1(292.89,248.87) 292.89,238.76 J10.30
D9: length 275.3
  TOP w0.508: v1(290.78,293.95) 290.78,298.93 83.82,298.93 U8.12
  BOTTOM w0.508: J10.28 290.78,236.22 v1(290.78,293.95)
D10: length 276.9
  TOP w0.508: v1(82.7,237.59) 290.68,237.59 290.68,233.68 J10.26
  BOTTOM w0.508: v1(82.7,237.59) 82.7,297.18 U8.13
D11: length 296.2
  TOP w0.508: U8.14 78.74,299.57 v1(298.27,299.57)
  BOTTOM w0.508: v1(298.27,299.57) 298.27,230.05 294.64,230.05 J10.24
D12: length 341.9
  TOP w0.508: v1(72.29,218.89) 72.29,209.4 281.2,209.4 v1(281.2,208.71) ; J10.22 289.41,228.6 289.41,232.26 v1(284.48,232.26)
  BOTTOM w0.508: U8.15 76.2,293.22 72.29,293.22 v1(72.29,218.89) ; v1(281.2,208.71) 284.43,208.71 284.43,231.57 284.48,231.57 v1(284.48,232.26)
D13: length 295.6
  TOP w0.508: J10.20 288.77,226.06 288.77,229.72 v1(129.06,229.72)
  BOTTOM w0.508: U8.16 73.66,298.93 129.06,298.93 v1(129.06,229.72)
D14: length 314.5
  TOP w0.508: v1(299.59,227.15) 299.59,300.89 71.12,300.89 U8.17
  BOTTOM w0.508: J10.18 295.73,223.52 295.73,227.15 v1(299.59,227.15)
D15: length 304.5
  TOP w0.508: v1(69.85,221.72) 275.38,221.72 275.38,219.86 288.77,219.86 288.77,220.98 J10.16
  BOTTOM w0.508: U8.18 69.85,297.18 v1(69.85,221.72)
DEN: length 54.1
  TOP w0.508: v1(63.5,278.61) 50.8,278.61 ; 50.8,278.61 U1.26 ; 50.8,278.61 33.02,278.61 U7.1
  BOTTOM w0.508: U8.1 v1(63.5,278.61)
DTR: length 53
  BOTTOM w0.508: 47.14,296.06 66.04,296.06 U8.19 ; 47.14,296.06 35.56,296.06 U7.19 ; 47.14,296.06 47.14,284.96 48.26,284.96 U1.27
MIO: length 40.6
  TOP w0.508: U3.18 279.4,196.7 294.64,196.7 J10.2
  BOTTOM w0.508: 269.24,203.2 269.24,195.58 U3.18
MIOX: length 327.4
  TOP w0.508: U3.2 287.02,194.16 v1(48.45,194.16)
  BOTTOM w0.508: v1(48.45,194.16) 48.45,253.05 44.6,253.05 44.6,267.18 45.72,267.18 U1.28
PCLK: length 383.5
  TOP w0.508: U22.3 170.18,16.61 v1(18.03,16.61)
  BOTTOM w0.508: v1(18.03,16.61) 18.03,245.26 17.78,245.26 U2.2
RD: length 32.7
  TOP w0.508: 278.28,204.62 278.28,205.74 269.24,205.74 ; 278.28,204.62 278.28,200.66 U3.16 ; 278.28,204.62 294.64,204.62 J10.4
RDX: length 330.2
  TOP w0.508: v1(37.02,199.24) 287.02,199.24 U3.4
  BOTTOM w0.508: v1(37.02,199.24) 37.02,254.95 36.68,254.95 36.68,267.18 35.56,267.18 U1.32
RESET: length 388.2
  TOP w0.508: v1(62.38,257.86) 35.56,257.86 U2.10 ; U22.9 170.18,29.36 62.38,29.36 v1(62.38,31.6)
  BOTTOM w0.508: v1(62.38,31.6) v1(62.38,257.86) 62.38,276.86 U1.21
WR: length 29.1
  TOP w0.508: 269.24,208.28 269.24,207.16 279.4,207.16 ; 279.4,207.16 U3.14 ; 279.4,207.16 294.64,207.16 J10.6
WRX: length 322
  TOP w0.508: v1(277.6,202.08) v1(42.06,202.08)
  BOTTOM w0.508: v1(277.6,202.08) 287.02,202.08 U3.6 ; U1.29 42.06,276.86 v1(42.06,202.08)
N00598: length 84
  TOP w0.508: 48.26,252.88 48.26,250.34 v1(49.53,250.34) 85.22,250.34 SW1.4 ; 48.26,252.88 R1.2 ; 48.26,252.88 33.02,252.88 U2.11
  BOTTOM w0.508: U2.11 34.14,254 34.14,238.76 C1.1 ; D1.2 v1(49.53,250.34)
N00858: length 15.4
  TOP w0.508: U2.16 20.32,251.33 Y1.2
N00870: length 17.8
  BOTTOM w0.508: U2.17 17.78,248.77 7.62,248.77 Y1.1
N02031: length 68.3
  TOP w0.508: U2.5 25.4,245.26 v1(59.79,245.26)
  BOTTOM w0.508: v1(59.79,245.26) 59.79,276.86 U1.22
N02057: length 47.7
  TOP w0.508: U1.19 60.96,262.74 31.9,262.74 31.9,246.38 U2.8
N55935: length 143.6
  TOP w0.508: SW4.2 235.08,62.23 ; 235.08,62.23 222.38,62.23 ; 235.08,62.23 247.78,62.23 SW5.2 ; 222.38,62.23 209.68,62.23 SW2.2 ; 222.38,62.23 SW3.2
  BOTTOM w0.508: U22.38 154.94,16.51 205.74,16.51 205.74,60.96 SW2.2
N56126: length 130.9
  TOP w0.508: SW9.2 247.78,44.45 235.08,44.45 ; 235.08,44.45 222.38,44.45 ; 235.08,44.45 SW8.2 ; 222.38,44.45 209.68,44.45 SW6.2 ; 222.38,44.45 SW7.2
  BOTTOM w0.508: SW6.2 207.01,45.72 207.01,13.82 154.94,13.82 U22.39
N56183: length 103
  TOP w0.508: 235.08,29.21 247.78,29.21 SW13.2 ; 235.08,29.21 222.38,29.21 ; 235.08,29.21 SW12.2 ; SW10.2 209.68,29.21 222.38,29.21 ; 222.38,29.21 SW11.2
  BOTTOM w0.508: U22.1 208.28,10.16 208.28,30.48 SW10.2
N56240: length 83.9
  TOP w0.508: 209.68,13.97 222.38,13.97 ; 209.68,13.97 209.68,12.7 U22.2 ; 209.68,13.97 SW14.2 ; 222.38,13.97 235.08,13.97 ; 222.38,13.97 SW15.2 ; 235.08,13.97 247.78,13.97 SW17.2 ; 235.08,13.97 SW16.2
N56297: length 146.8
  TOP w0.508: 247.78,19.68 247.78,21.44 154.94,21.44 U22.35
  BOTTOM w0.508: 246.51,34.92 246.51,19.68 247.78,19.68 ; 246.51,34.92 SW13.4 ; 246.51,34.92 246.51,50.16 ; 247.78,65.41 246.51,65.41 246.51,50.16 ; SW9.4 246.51,50.16
N56375: length 134.1
  TOP w0.508: U22.34 154.94,24.28 236.35,24.28 v1(236.35,25.02)
  BOTTOM w0.508: SW8.4 236.35,50.16 ; 236.35,50.16 236.35,65.41 235.08,65.41 ; 236.35,50.16 236.35,34.92 ; SW12.4 236.35,34.92 ; 236.35,34.92 v1(236.35,25.02) 236.35,19.68 235.08,19.68
N56504: length 128.7
  TOP w0.508: SW11.4 222.38,36.68 169.06,36.68 v1(169.06,34.73)
  BOTTOM w0.508: 221.11,34.92 221.11,19.68 222.38,19.68 ; 221.11,34.92 SW11.4 ; 221.11,34.92 221.11,50.16 ; 222.38,65.41 221.11,65.41 221.11,50.16 ; SW7.4 221.11,50.16 ; v1(169.06,34.73) 169.06,27.94 U22.33
N56571: length 110
  TOP w0.508: SW10.4 209.68,31.75 154.94,31.75 U22.32
  BOTTOM w0.508: SW6.4 210.95,50.16 ; 210.95,50.16 210.95,65.41 209.68,65.41 ; 210.95,50.16 210.95,34.92 ; 210.95,34.92 SW10.4 ; 210.95,34.92 210.95,19.68 209.68,19.68
N56977: length 51.8
  TOP w0.508: U22.37 153.19,17.78 153.19,26.52 190.5,26.52 SW18.1
N56984: length 40.6
  TOP w0.508: SW19.1 180.19,15.24 180.19,18.9 154.94,18.9 U22.36
N57547: length 63.5
  TOP w0.508: U22.22 v1(127,55.88)
  BOTTOM w0.508: U21.12 v1(127,55.88)
N146408: length 20
  BOTTOM w0.508: U1.17 57,261.62 57,243.84 U35.2
N146815: length 20.3
  BOTTOM w0.508: D2.1 53.34,226.06 R6.2 U35.1
N146827: length 35.6
  TOP w0.508: SW21.3 67.31,235.59 67.31,235.27 45.72,235.27 R6.1
  BOTTOM w0.508: D2.2 44.45,236.22 R6.1
